# EAGLE board dual_sampler-layedout (EAGLE 8.3.2)
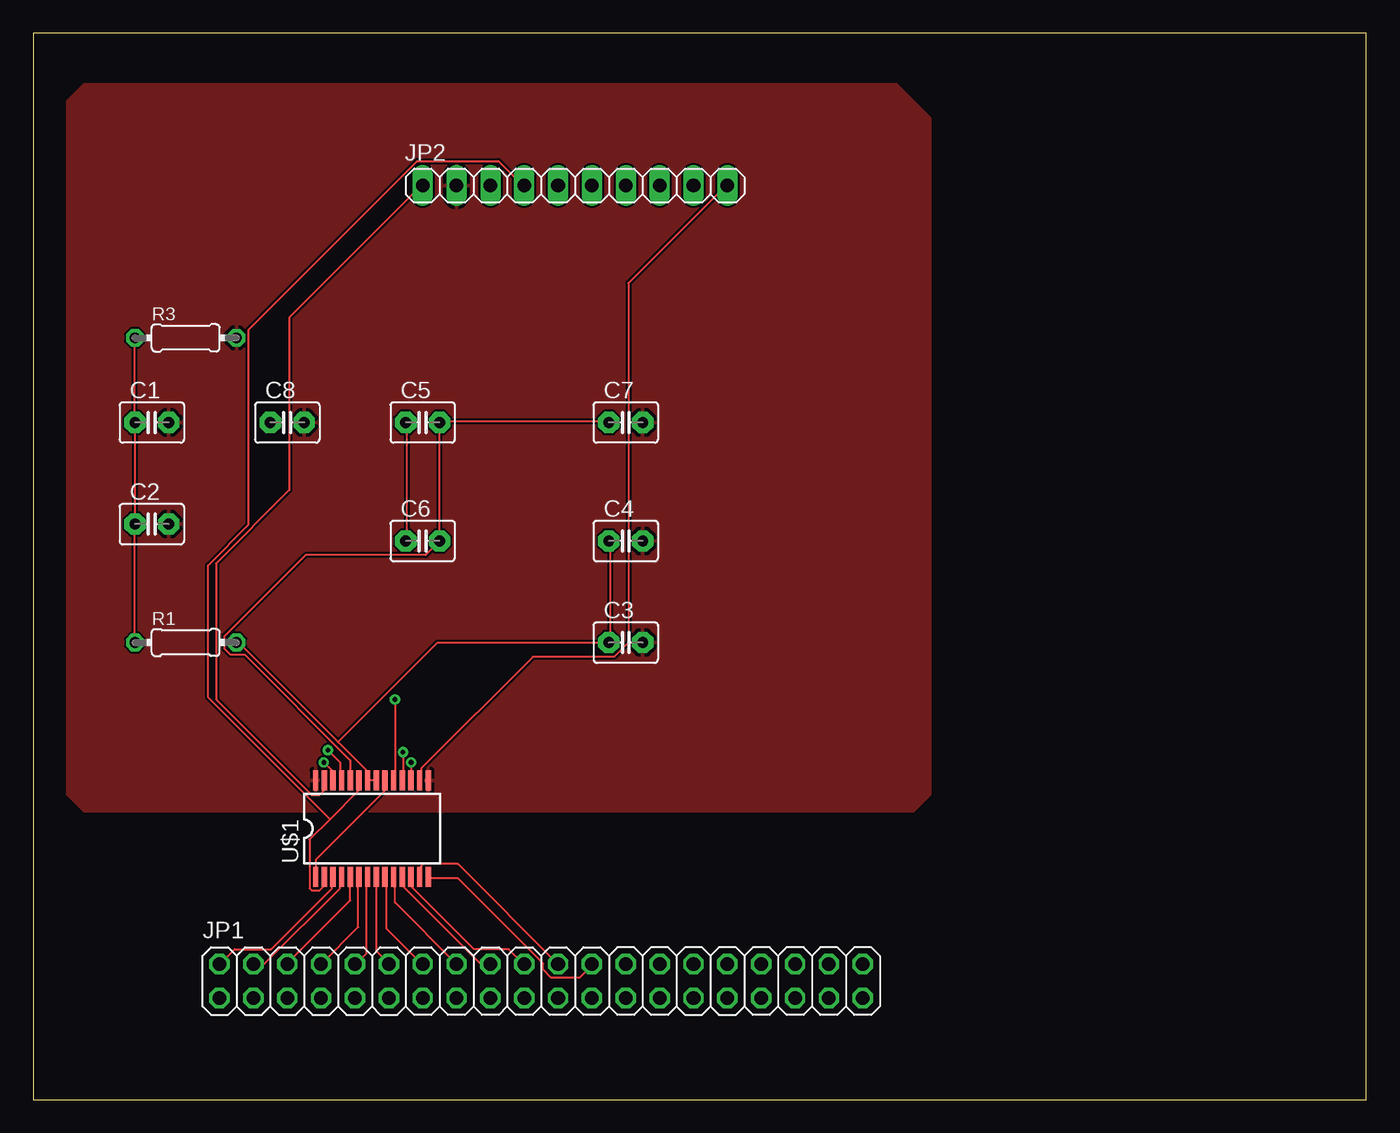
[diagram p0: board, top side]
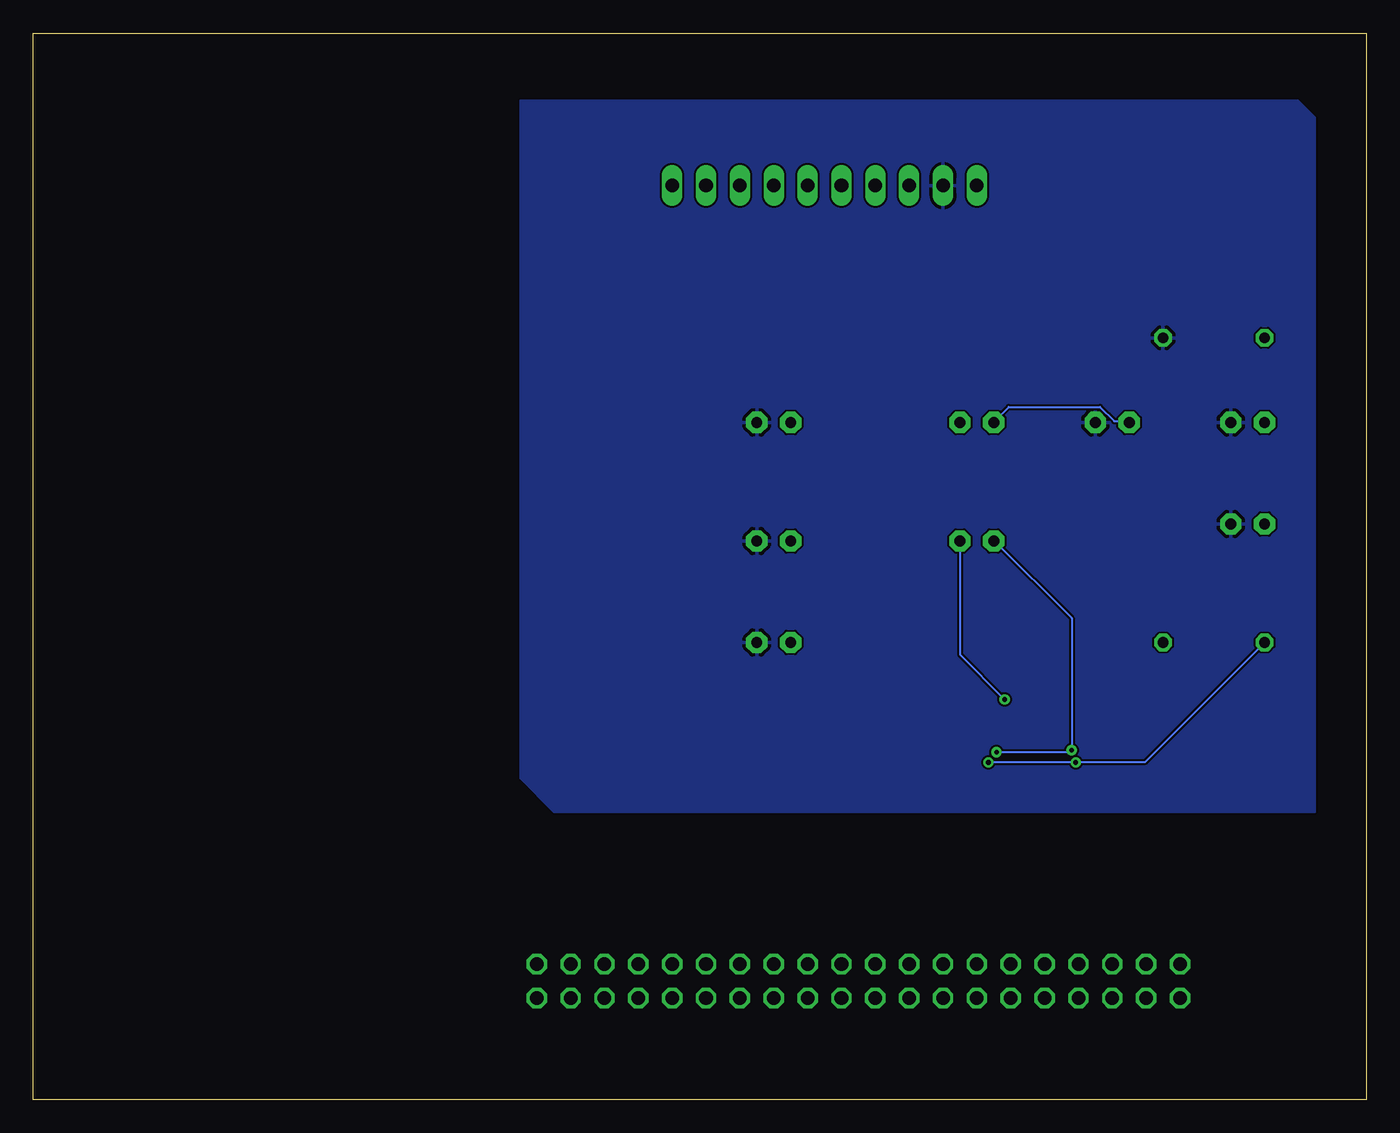
[diagram p1: board, bottom side, seen from below]

Size 100 x 80 mm. Coordinates in mm from the lower left corner, seen from the top.
Outline: 0,0 100,0 100,80 0,80 0,0
Copper layers (1*16): Top 0.035mm / dielectric 1.5mm / Bottom 0.035mm
Design rules "default": minimum track width 6mil, minimum drill 0.35mm, track to track 6mil, track to pad 6mil, pad to pad 6mil, via to via 6mil, smd to smd 6mil, copper to edge 40mil, drill to drill 6mil, minimum pad ring 10mil, minimum via ring 8mil, stop-mask expansion 4mil, vias tented up to drill 0mil, thermal gap 10mil

## Footprints (pad centres in the part's own frame; a part is rotated, then mirrored left to right if it is on the bottom)
C2.5-3 = drill 0.813 pad 1.6 octagon: 1 -1.27,0; 2 1.27,0
2X20 = drill 1.016 octagon: 1 -24.13,-1.27; 2 -24.13,1.27; 3 -21.59,-1.27; 4 -21.59,1.27; 5 -19.05,-1.27; 6 -19.05,1.27; 7 -16.51,-1.27; 8 -16.51,1.27; 9 -13.97,-1.27; 10 -13.97,1.27; 11 -11.43,-1.27; 12 -11.43,1.27; 13 -8.89,-1.27; 14 -8.89,1.27; 15 -6.35,-1.27; 16 -6.35,1.27; 17 -3.81,-1.27; 18 -3.81,1.27; 19 -1.27,-1.27; 20 -1.27,1.27; 21 1.27,-1.27; 22 1.27,1.27; 23 3.81,-1.27; 24 3.81,1.27; 25 6.35,-1.27; 26 6.35,1.27; 27 8.89,-1.27; 28 8.89,1.27; 29 11.43,-1.27; 30 11.43,1.27; 31 13.97,-1.27; 32 13.97,1.27; 33 16.51,-1.27; 34 16.51,1.27; 35 19.05,-1.27; 36 19.05,1.27; 37 21.59,-1.27; 38 21.59,1.27; 39 24.13,-1.27; 40 24.13,1.27
1X10 = drill 1.016 long: 1 -11.43,0; 2 -8.89,0; 3 -6.35,0; 4 -3.81,0; 5 -1.27,0; 6 1.27,0; 7 3.81,0; 8 6.35,0; 9 8.89,0; 10 11.43,0
0204/7 = drill 0.813 octagon: 1 -3.81,0; 2 3.81,0
SSOP28 = smd 0.4 x 1.5: 1 -4.225,-3.625; 2 -3.575,-3.625; 3 -2.925,-3.625; 4 -2.275,-3.625; 5 -1.625,-3.625; 6 -0.975,-3.625; 7 -0.325,-3.625; 8 0.325,-3.625; 9 0.975,-3.625; 10 1.625,-3.625; 11 2.275,-3.625; 12 2.925,-3.625; 13 3.575,-3.625; 14 4.225,-3.625; 15 4.225,3.625; 16 3.575,3.625; 17 2.925,3.625; 18 2.275,3.625; 19 1.625,3.625; 20 0.975,3.625; 21 0.325,3.625; 22 -0.325,3.625; 23 -0.975,3.625; 24 -1.625,3.625; 25 -2.275,3.625; 26 -2.925,3.625; 27 -3.575,3.625; 28 -4.225,3.625

## Placement (x,y rotation side)
C1  10 uF  [C2.5-3]  8.89,50.8 0 top
C2  0.1 uF  [C2.5-3]  8.89,43.18 0 top
C3  10 uF  [C2.5-3]  44.45,34.29 0 top
C4  0.1 uF  [C2.5-3]  44.45,41.91 0 top
C5  0.1 uF  [C2.5-3]  29.21,50.8 0 top
C6  10 uF  [C2.5-3]  29.21,41.91 0 top
C7  0.1 uF  [C2.5-3]  44.45,50.8 0 top
C8  0.1 uF  [C2.5-3]  19.05,50.8 0 top
JP1  0  [2X20]  38.1,8.89 0 top
JP2  0  [1X10]  40.64,68.58 0 top
R1  5 kOhm  [0204/7]  11.43,34.29 0 top
R3  5 kOhm  [0204/7]  11.43,57.15 0 top
U$1  AD9201ARSZ  [SSOP28]  25.4,20.32 0 top

## Library data of the parts
C1-C8 = capacitor-wima
JP1 JP2 = pinhead
R1 R3 = resistor
U$1 = sampler_lib

## Nets
CLK: JP1.24 U$1.14
D0: JP1.2 U$1.3
D1: JP1.4 U$1.4
D2: JP1.6 U$1.5
D3: JP1.8 U$1.6
D4: JP1.10 U$1.7
D5: JP1.12 U$1.8
D6: JP1.14 U$1.9
D7: JP1.16 U$1.10
D8: JP1.18 U$1.11
D9: JP1.20 U$1.12
DGND: U$1.1 U$1.20
GND: C1.2 C2.2 C3.2 C4.2 C7.2 C8.2 JP2.2 R3.2 U$1.15 U$1.28
INA-I: JP2.10 U$1.16
INA-Q: JP2.1 U$1.27
INB: C1.1 C2.1 R1.1 R3.1 U$1.17 U$1.26
REFB: C5.2 C6.2 C7.1 U$1.19 U$1.24
REFT: C5.1 C6.1 C8.1 U$1.18 U$1.25
SELECT: JP1.22 U$1.13
VCC: JP2.4 U$1.2 U$1.23
VREF: C3.1 C4.1 R1.2 U$1.21 U$1.22

## Tracks (layer width: path | path; a pad name or v marks a point on that pad's centre or on a via)
CLK
  Top 0.152: U$1.14 29.72,16.61 31.85,16.61 38.25,10.21 38.25,9.75 38.86,9.14 41,9.14 41.91,10.06 JP1.24
D0
  Top 0.152: JP1.2 15.09,11.28 17.83,11.28 22.4,15.85 22.4,16.61 U$1.3
D1
  Top 0.152: U$1.4 23.01,16.61 23.01,15.85 17.37,10.21 16.61,10.21 JP1.4
D2
  Top 0.152: U$1.5 23.77,16.61 23.77,14.94 19.05,10.21 JP1.6
D3
  Top 0.152: JP1.8 24.38,12.95 24.38,16.61 U$1.6
D4
  Top 0.152: U$1.7 24.99,16.61 24.99,10.97 24.23,10.21 JP1.10
D5
  Top 0.152: U$1.8 25.76,16.61 25.76,11.12 26.67,10.21 JP1.12
D6
  Top 0.152: U$1.9 26.52,16.61 26.52,12.8 29.11,10.21 JP1.14
D7
  Top 0.152: JP1.16 27.13,14.78 27.13,16.61 U$1.10
D8
  Top 0.152: U$1.11 27.74,16.61 27.74,16 33.53,10.21 34.29,10.21 JP1.18
D9
  Top 0.152: U$1.12 28.35,16.61 28.35,16 33.07,11.28 35.66,11.28 36.73,10.21 JP1.20
DGND
  Top 0.152: U$1.1 21.18,16.76 21.18,17.98 26.36,23.16 26.36,23.93 U$1.20
GND
  Top 0.152: 29.72,24.08 U$1.15
  pour Top: 3.81,76.2 64.77,76.2 67.31,73.66 67.31,22.86 66.04,21.59 3.81,21.59 2.54,22.86 2.54,74.93
  pour Bottom: 5.08,74.93 63.5,74.93 63.5,24.13 60.96,21.59 3.81,21.59 3.81,73.66
INA-I
  Top 0.152: U$1.16 29.11,24.08 29.11,24.84 37.49,33.22 43.59,33.22 44.65,34.29 44.65,61.27 51.97,68.58 JP2.10
INA-Q
  Top 0.152: U$1.27 21.79,23.93 21.79,23.16 21.49,22.86 20.88,22.86 13.72,30.02 13.72,40.23 19.2,45.72 19.2,58.67 29.11,68.58 JP2.1
INB  (via drill 0.35)
  Top 0.152: R3.1 C1.1 C2.1 R1.1 | v21.79,25.3 22.4,24.69 22.4,24.08 U$1.26 | v28.35,25.3 28.35,24.08 U$1.17
  Bottom 0.152: R1.1 16.61,25.3 v21.79,25.3 v28.35,25.3
REFB  (via drill 0.35)
  Top 0.152: U$1.24 23.77,24.08 23.77,25.45 15.85,33.38 14.78,33.38 14.33,33.83 14.33,34.75 20.42,40.84 29.41,40.84 C6.2 C5.2 30.48,50.9 43.13,50.9 C7.1 | v27.13,30.02 27.13,24.08 U$1.19
  Bottom 0.152: v27.13,30.02 30.48,33.38 C6.2
REFT  (via drill 0.35)
  Top 0.152: v22.1,26.21 23.01,25.3 23.01,24.08 U$1.25 | v27.74,26.06 27.74,24.08 U$1.18 | C5.1 28.04,50.75 28.04,41.91 C6.1
  Bottom 0.152: C8.1 17.83,50.9 18.9,50.9 19.96,51.97 26.82,51.97 27.89,50.9 C5.1 | C6.1 27.89,41.91 22.1,36.12 v22.1,26.21 22.25,26.06 v27.74,26.06
SELECT
  Top 0.152: JP1.22 31.85,17.68 29.26,17.68 29.11,17.53 29.11,16.76 U$1.13
VCC
  Top 0.152: 22.25,21.03 24.38,23.16 24.38,23.93 U$1.23 | 22.25,21.03 20.73,19.51 20.73,15.85 20.88,15.7 21.49,15.7 21.79,16 21.79,16.61 U$1.2 | 22.25,21.03 13.11,30.18 13.11,40.08 16.15,43.13 16.15,57.76 28.8,70.41 34.9,70.41 36.73,68.58 JP2.4
VREF
  Top 0.152: C4.1 43.28,41.91 43.28,34.29 C3.1 30.33,34.29 22.86,26.82 | U$1.21 25.6,23.93 25.15,23.93 U$1.22 24.99,24.08 24.99,24.69 22.86,26.82 | 22.86,26.82 15.39,34.29 R1.2